# EAGLE board afron_line_sensor (EAGLE 6.1)
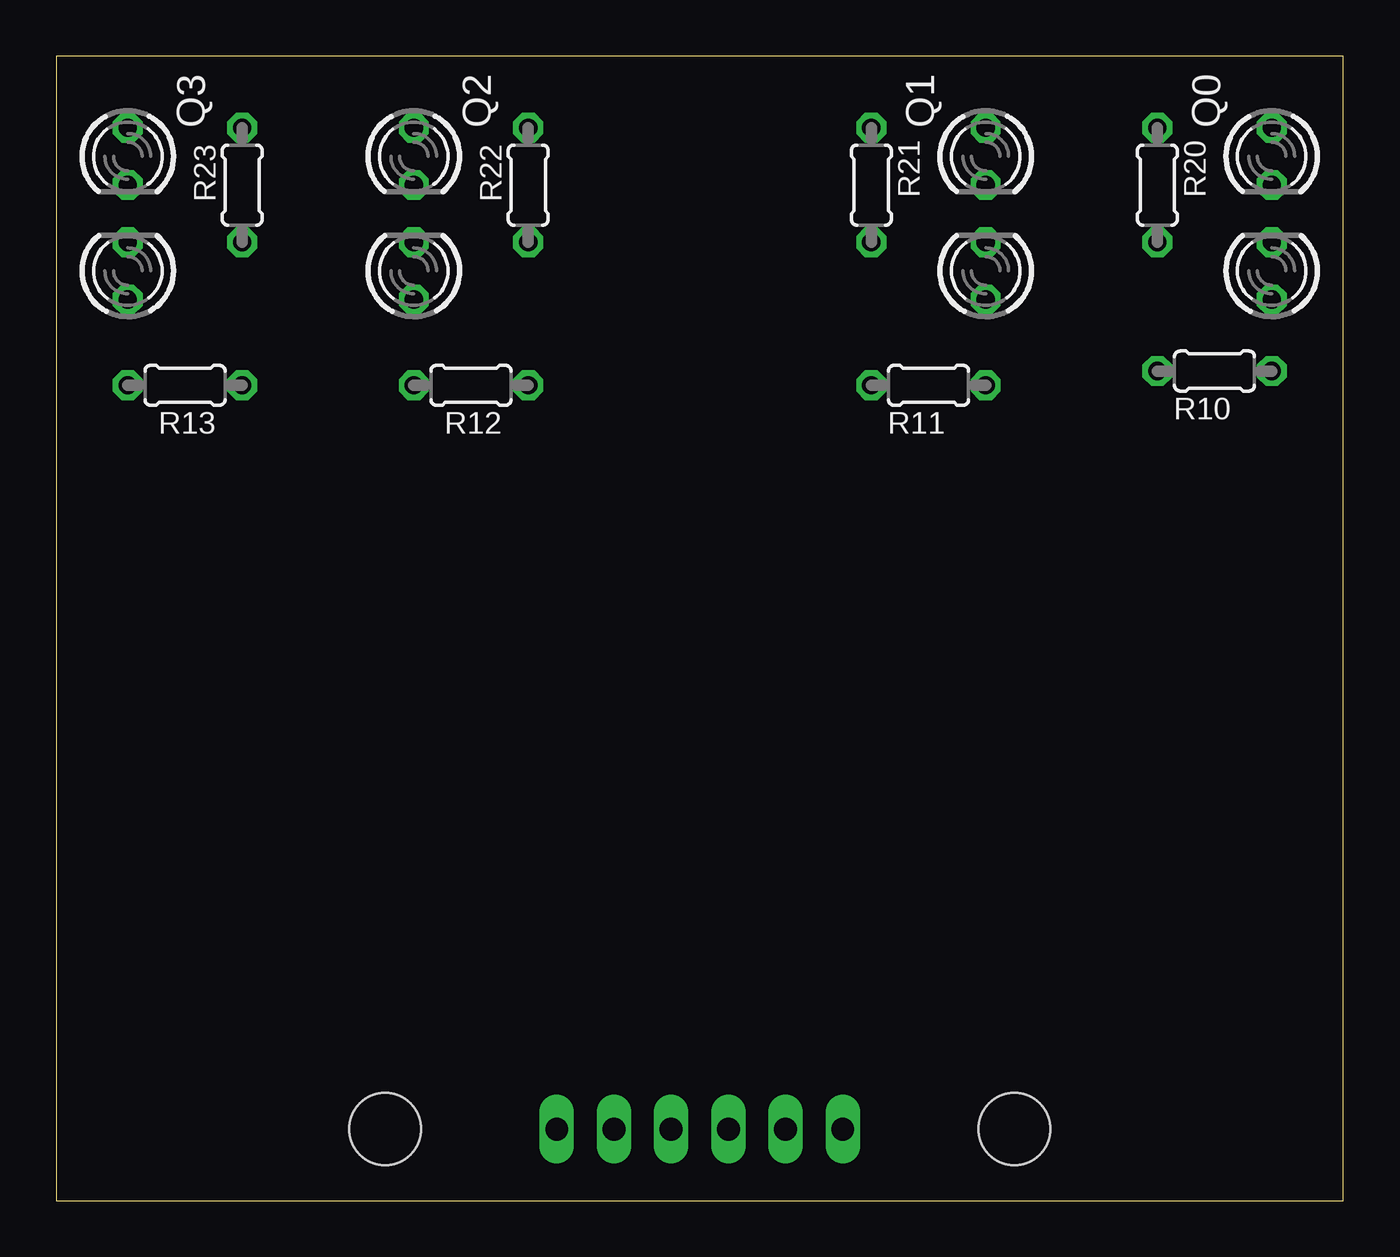
[diagram p0: board, top side]
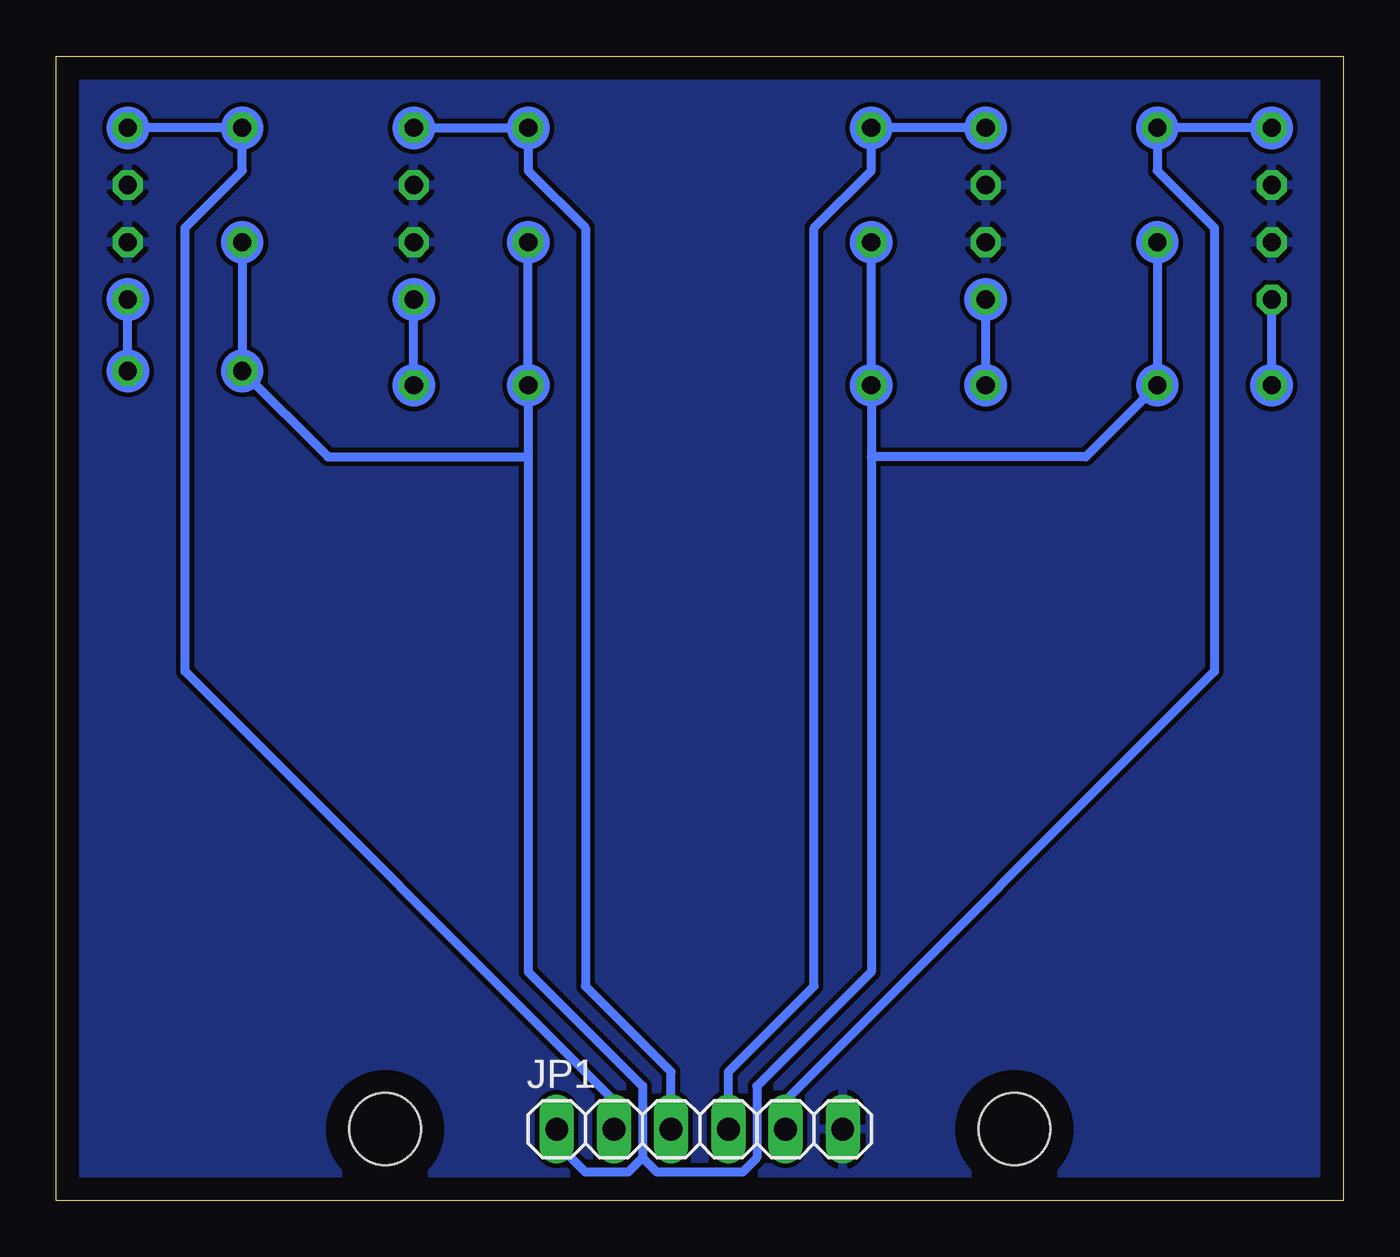
[diagram p1: board, bottom side, seen from below]

Size 57.15 x 50.8 mm. Coordinates in mm from the lower left corner, seen from the top.
Outline: 0,0 57.15,0 57.15,50.8 0,50.8 0,0
Copper layers (1*16): Top 0.035mm / dielectric 1.5mm / Bottom 0.035mm
Design rules: minimum track width 10mil, minimum drill 24mil, track to track 8mil, track to pad 8mil, pad to pad 8mil, via to via 8mil, smd to smd 8mil, copper to edge 40mil, drill to drill 8mil, minimum pad ring 10mil, minimum via ring 8mil, stop-mask expansion 4mil, vias tented up to drill 0mil, thermal gap 10mil
Holes 3.2 mm at 14.61,3.17 42.55,3.17

## Footprints (pad centres in the part's own frame; a part is rotated, then mirrored left to right if it is on the bottom)
1X06 = drill 1.016 long: 1 -6.35,0; 2 -3.81,0; 3 -1.27,0; 4 1.27,0; 5 3.81,0; 6 6.35,0
LED3MM = drill 0.813 octagon: A -1.27,0; K 1.27,0
0204/5 = drill 0.813 octagon: 1 -2.54,0; 2 2.54,0

## Placement (x,y rotation side)
JP1  [1X06]  28.57,3.17 0 bottom
LED0  [LED3MM]  53.98,41.27 90 top
LED1  [LED3MM]  41.27,41.27 90 top
LED2  [LED3MM]  15.88,41.27 90 top
LED3  [LED3MM]  3.17,41.27 90 top
Q0  [LED3MM]  53.98,46.35 270 top
Q1  [LED3MM]  41.27,46.35 270 top
Q2  [LED3MM]  15.88,46.35 270 top
Q3  [LED3MM]  3.17,46.35 270 top
R10  100  [0204/5]  51.44,36.83 180 top
R11  100  [0204/5]  38.73,36.2 180 top
R12  100  [0204/5]  18.41,36.2 0 top
R13  100  [0204/5]  5.71,36.2 0 top
R20  10K  [0204/5]  48.9,45.09 270 top
R21  10K  [0204/5]  36.2,45.09 270 top
R22  10K  [0204/5]  20.95,45.09 270 top
R23  10K  [0204/5]  8.26,45.09 270 top

## Library data of the parts
JP1 = pinhead-2
LED0 LED1-LED3 = led
Q0 Q1-Q3 = mes_opto
R10-R13 R20-R23 = resistor

## Nets
GND: JP1.6 LED0.K LED1.K LED2.K LED3.K Q0.K Q1.K Q2.K Q3.K
N$1: LED0.A R10.1
N$2: LED2.A R12.1
N$3: LED3.A R13.1
N$7: LED1.A R11.1
SENSE0: JP1.2 Q0.A R20.1
SENSE1: JP1.3 Q1.A R21.1
SENSE2: JP1.4 Q2.A R22.1
SENSE3: JP1.5 Q3.A R23.1
VCC: JP1.1 R10.2 R11.2 R12.2 R13.2 R20.2 R21.2 R22.2 R23.2

## Tracks (layer width: path | path; a pad name or v marks a point on that pad's centre or on a via)
GND
  pour Bottom: -0.64,51.44 57.78,51.44 57.78,0 -0.64,0
N$1
  Bottom 0.406: R10.1 LED0.A
N$2
  Bottom 0.406: R12.1 LED2.A
N$3
  Bottom 0.406: R13.1 LED3.A
N$7
  Bottom 0.406: R11.1 LED1.A
SENSE0
  Bottom 0.406: JP1.2 32.38,4.45 51.44,23.5 51.44,43.18 48.9,45.72 R20.1 Q0.A
SENSE1
  Bottom 0.406: JP1.3 29.84,5.71 33.66,9.53 33.66,43.18 36.2,45.72 R21.1 Q1.A
SENSE2
  Bottom 0.406: JP1.4 27.3,5.71 23.5,9.53 23.5,43.18 20.95,45.72 R22.1 Q2.A
SENSE3
  Bottom 0.406: JP1.5 24.77,4.45 5.71,23.5 5.71,43.18 8.26,45.72 R23.1 Q3.A
VCC
  Bottom 0.406: R20.2 R10.2 45.09,33.02 36.2,33.02 | R23.2 R13.2 11.43,33.02 20.95,33.02 | R22.2 R12.2 20.95,33.02 | R21.2 R11.2 36.2,33.02 | 36.2,33.02 36.2,10.16 31.11,5.08 31.11,1.91 | 31.11,1.91 31.75,1.27 33.66,1.27 34.92,2.54 JP1.1 | 20.95,33.02 20.95,10.16 26.04,5.08 26.04,1.91 26.67,1.27 30.48,1.27 31.11,1.91
(copper drawn outside any net)
  shapes: Bottom circle x23